# EAGLE board folimetro_pcb (EAGLE 6.2)
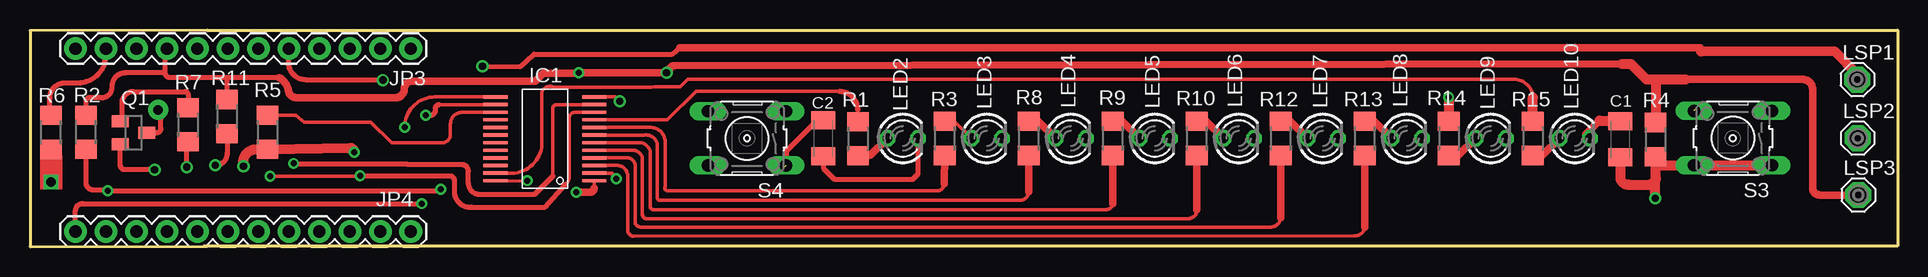
[diagram p0: board, top side]
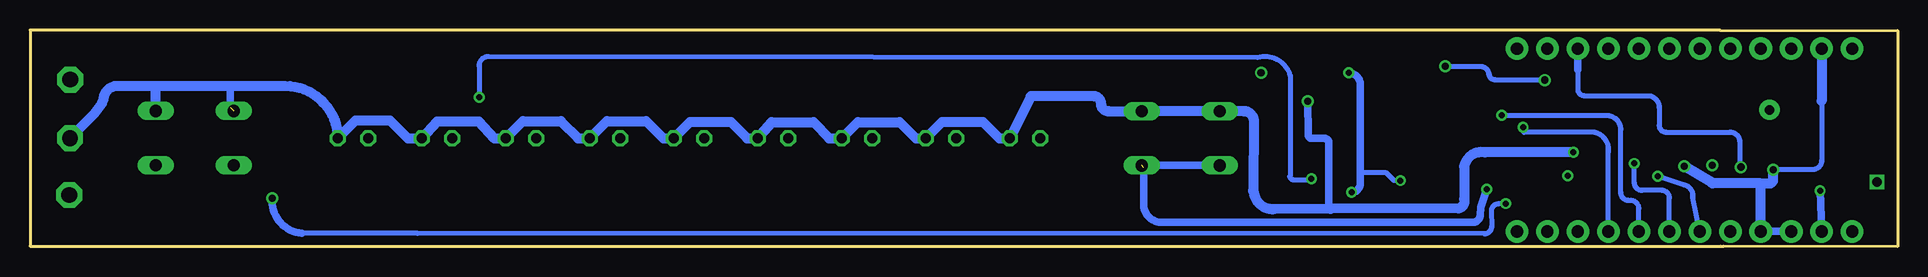
[diagram p1: board, bottom side, seen from below]

Size 155.64 x 18.06 mm. Coordinates in mm from the lower left corner, seen from the top.
Outline: 14.5,0.04 155.64,0.06 155.64,18.06 14.79,18.03
Outline: 14.77,0.03 0,0 0,18 14.77,18.03
Copper layers (1*16): Top 0.035mm / dielectric 1.5mm / Bottom 0.035mm
Design rules: minimum track width 10mil, minimum drill 24mil, track to track 8mil, track to pad 8mil, pad to pad 8mil, via to via 8mil, smd to smd 8mil, copper to edge 40mil, drill to drill 8mil, minimum pad ring 10mil, minimum via ring 8mil, stop-mask expansion 4mil, vias tented up to drill 0mil, thermal gap 10mil

## Footprints (pad centres in the part's own frame; a part is rotated, then mirrored left to right if it is on the bottom)
C1206K = smd 1.5 x 2: 1 -1.5,0; 2 1.5,0
SO24W = smd 0.279 x 2.032: 1 -6.985,-4.115; 2 -6.35,-4.115; 3 -5.715,-4.115; 4 -5.08,-4.115; 5 -4.445,-4.115; 6 -3.81,-4.115; 7 -3.175,-4.115; 8 -2.54,-4.115; 9 -1.905,-4.115; 10 -1.27,-4.115; 11 -0.635,-4.115; 12 0,-4.115; 13 0,4.115; 14 -0.635,4.115; 15 -1.27,4.115; 16 -1.905,4.115; 17 -2.54,4.115; 18 -3.175,4.115; 19 -3.81,4.115; 20 -4.445,4.115; 21 -5.08,4.115; 22 -5.715,4.115; 23 -6.35,4.115; 24 -6.985,4.115
1X12 = drill 1.016 pad 1.88: 1 0,0; 2 2.54,0; 3 5.08,0; 4 7.62,0; 5 10.16,0; 6 12.7,0; 7 15.24,0; 8 17.78,0; 9 20.32,0; 10 22.86,0; 11 25.4,0; 12 27.94,0
LED3MM = drill 0.813 octagon: A -1.27,0; K 1.27,0
SE13 = drill 1.321 pad 2.159 octagon: MP 0,0
SOT23 = smd 1 x 1.4: 1 -0.95,-1.1; 2 0.95,-1.1; 3 0,1.1
R1206 = smd 1.6 x 1.803: 1 -1.422,0; 2 1.422,0
B3F-10XX = drill 1.016 long: 1 -3.251,2.261; 2 3.251,2.261; 3 -3.251,-2.261; 4 3.251,-2.261

## Placement (x,y rotation side)
C1  [C1206K]  132.53,8.94 90 top
C2  [C1206K]  66.11,9.03 270 top
IC1  [SO24W]  42.91,12.48 90 top
JP3  [1X12]  3.79,16.51 0 top
JP4  [1X12]  31.73,1.27 180 top
LED2  [LED3MM]  72.73,9.03 0 top
LED3  [LED3MM]  79.73,9.03 0 top
LED4  [LED3MM]  86.73,9.03 0 top
LED5  [LED3MM]  93.73,9.03 0 top
LED6  [LED3MM]  100.73,9.03 0 top
LED7  [LED3MM]  107.73,9.03 0 top
LED8  [LED3MM]  114.73,9.03 0 top
LED9  [LED3MM]  121.73,9.03 0 top
LED10  [LED3MM]  128.73,9.03 0 top
LSP1  SE13  [SE13]  152.28,13.93 0 top
LSP2  SE13  [SE13]  152.31,9.05 0 top
LSP3  SE13  [SE13]  152.36,4.31 0 top
Q1  BC547  [SOT23]  8.63,9.5 270 top
R1  [R1206]  68.99,9 90 top
R2  [R1206]  4.66,9.54 270 top
R3  [R1206]  76.23,9.03 270 top
R4  [R1206]  135.47,8.93 90 top
R5  [R1206]  19.79,9.54 90 top
R6  [R1206]  1.76,9.53 270 top
R7  [R1206]  13.16,10.17 90 top
R8  [R1206]  83.23,9.03 270 top
R9  [R1206]  90.23,9.03 270 top
R10  [R1206]  97.23,9.03 270 top
R11  [R1206]  16.43,10.84 90 top
R12  [R1206]  104.23,9.03 270 top
R13  [R1206]  111.23,9.03 270 top
R14  [R1206]  118.23,9.03 90 top
R15  [R1206]  125.23,9.03 90 top
S3  [B3F-10XX]  141.91,9.05 180 top
S4  [B3F-10XX]  59.75,9.03 180 top

## Library data of the parts
C1 C2 R1-R4 R6 R8-R10 R12-R15 = rcl
IC1 = 40xx
JP3 JP4 = SparkFun
LED2-LED10 = led
LSP1-LSP3 = solpad
Q1 = transistor-npn
R5 R7 R11 = resistor
S3 S4 = switch-omron; MPN: B3F-1000; OC_FARNELL: 176432; OC_NEWARK: 36M3542

## Nets
+5V: IC1.1 IC1.24 JP3.4 LSP3.MP R2.1 R4.2 R11.2
GND [vcc]: C1.2 C2.2 IC1.12 JP3.2 JP4.9 JP4.10 LED2.K LED3.K LED4.K LED5.K LED6.K LED7.K LED8.K LED9.K LED10.K LSP2.MP Q1.2 R5.1 R6.1 S3.3 S3.4 S4.3 S4.4
N$1: C1.1 JP4.12 R4.1 S3.1 S3.2
N$2: Q1.1 R7.2
N$3: IC1.15 R5.2
N$4: IC1.10 JP4.7
N$5: IC1.11 JP4.6
N$6: IC1.14 JP4.5
N$7: IC1.13 JP4.4
N$9: IC1.9 R1.2
N$10: LED2.A R1.1
N$11: IC1.8 R3.2
N$12: LED3.A R3.1
N$13: IC1.2 R14.2
N$14: IC1.7 R8.2
N$15: LED4.A R8.1
N$16: IC1.6 R9.2
N$17: LED5.A R9.1
N$18: IC1.5 R10.2
N$19: LED6.A R10.1
N$20: IC1.4 R12.2
N$21: LED7.A R12.1
N$22: IC1.3 R13.2
N$23: LED8.A R13.1
N$24: IC1.23 R15.2
N$25: LED9.A R14.1
N$26: C2.1 JP4.11 R2.2 S4.1 S4.2
N$27: LED10.A R15.1
N$30 [vcc]: Q1.3
N$34: JP3.10 R7.1
N$35: R11.1
N$36: JP3.8 LSP1.MP

## Tracks (layer width: path | path; a pad name or v marks a point on that pad's centre or on a via)
+5V  (via drill 0.5, 0.6)
  Top 0.254: IC1.24 v41.43,5.52
  Top 0.305: 47,4.88 47,5.47 arc-90 IC1.1 | 45.71,14.46 v45.74,14.49 | 152.29,4.24 arc90 LSP3.MP
  Top 0.406: 4.41,10.38 arc90 R2.1 | 20.77,14.1 16.23,14.1 | 16.23,14.1 11.65,14.1 arc-90 11.26,14.49 | 11.26,14.49 11.26,16.36 arc-90 JP3.4 | 11.26,14.49 7.95,14.49 arc90 6.82,13.36 6.82,13.26 arc-90 5.96,12.4 4.92,12.4 arc90 4.66,12.14 R2.1 | R11.2 16.43,13.9 arc90 16.23,14.1 | 4.44,10.51 arc90 R2.1
  Top 0.61: 132.65,15.24 53.71,15.08 53.64,15.08 arc90 53.31,14.75 v53.05,14.49 v45.74,14.49 | v45.51,4.53 46.65,4.53 arc90 47,4.88 | 45.71,14.46 42.76,14.46 42.11,13.81 31.79,13.81 arc84 31.18,13.13 arc-90 30.46,12.41 23.02,12.43 22.32,12.43 arc-90 21.53,13 arc51 20.77,14.1 | LSP3.MP 149.15,4.31 arc-90 148.55,4.91 148.55,13.11 arc90 147.72,13.94 137.97,13.94 arc-90 137.96,13.95
  Top 0.813: 132.65,15.24 133.41,15.24 134.7,13.95 135.54,13.95 | 135.54,13.95 137.96,13.95 | R4.2 135.54,10.35 135.54,13.95
  Bottom 0.254: v41.43,5.52 41.23,5.5 | 44.77,6.15 44.79,6.13
  Bottom 0.406: 41.23,5.5 41.96,5.5 42.61,6.15 44.77,6.15
  Bottom 0.61: v45.74,14.49 arc90 44.79,13.54 44.79,6.13 44.79,5.25 arc90 v45.51,4.53
GND  (via drill 0.5, 0.6)  (1 unrouted)
  Top 0.305: IC1.12 48.79,12.48 v49.15,12.12
  Top 0.406: C2.2 66.11,6.56 67.03,5.64 73.58,5.64 74.02,6.08 74.02,9.01 LED2.K | R6.1 1.65,10.35 1.65,12.37 arc-90 2.94,13.66 4.01,13.66 arc90 6.33,15.98 JP3.2 | v10.38,6.42 7.9,6.42 arc-90 7.52,6.8 Q1.2 arc-90 Q1.2
  Top 0.61: v17.79,6.7 17.77,7.13 | 20.04,8.11 arc90 R5.1 | 130.79,10.51 129.65,9.38 LED10.K
  Top 0.813: 17.77,7.13 arc-90 18.92,8.11 20.04,8.11 | R5.1 26.65,8.24 arc-90 v27.02,7.87 | 130.79,10.51 132.46,10.51 arc-90 C1.2
  Bottom 0.305: 47.41,3.28 arc-90 47.28,3.15
  Bottom 0.406: 10.44,6.48 arc90 v10.38,6.42 arc90 v10.37,6.43 7.08,6.43 arc-90 6.33,7.18 6.33,12.14 | S4.4 56.15,11.29
  Bottom 0.61: JP4.10 JP4.9 11.49,1.27 | 15.45,5.27 arc90 15.54,5.36 | 53.7,4.65 arc90 53.62,4.5 | LED10.K 130,9.22 | v49.15,12.12 49.13,9.37 arc-90 48.78,9.02 47.75,9.02 arc90 47.41,8.68 47.41,3.28 | 145.16,13.12 145.44,13.4 | 138.95,11.6 138.95,13.4 | 10.45,6.48 10.44,6.48
  Bottom 0.813: JP4.9 11.41,5.27 | 11.41,5.27 15.45,5.27 | 15.54,5.36 v17.79,6.7 | v27.02,7.87 34.41,7.87 arc-90 36.12,6.69 36.12,3.97 arc90 36.58,3.19 47.28,3.15 51.94,3.13 arc90 53.62,4.5 | JP3.2 6.33,12.14 | LSP2.MP 150.32,11.04 149.66,11.93 149.5,12.28 arc90 148.38,13.4 145.44,13.4 138.95,13.4 134.37,13.4 arc90 LED10.K 128.5,10.53 125.66,10.53 124.16,9.03 LED9.K 121.71,10.45 118.23,10.45 116.94,9.03 LED8.K 114.56,10.47 111.4,10.47 109.96,9.03 LED7.K 107.56,10.47 104.3,10.47 102.86,9.03 LED6.K 100.63,10.4 97.24,10.4 95.87,9.03 LED5.K 93.84,10.38 90.33,10.38 89.05,9.03 LED4.K 86.65,10.38 83.17,10.38 81.82,9.03 LED3.K 79.62,10.41 76.24,10.41 74.86,9.03 LED2.K arc-90 73.96,9.07 72.27,12.44 arc90 72.15,12.56 67.02,12.56 arc90 66.39,11.93 66.39,11.9 arc-90 65.78,11.29 S4.3 arc-90 S4.3 S4.4 56.46,11.3 54.57,11.3 arc90 53.66,10.57 53.72,4.67 arc-90 53.7,4.65 | 11.41,5.27 10.7,5.27 arc-90 10.39,5.58 v10.39,6.41 arc90 v10.38,6.42 | S3.3 145.16,13.12
N$1  (via drill 0.5, 0.6)
  Top 0.406: JP4.12 3.79,3 arc-90 4.4,3.6 v32.65,3.6
  Top 0.813: C1.1 132.53,5.8 arc90 133.15,5.18 134.98,5.18 arc90 135.48,5.68 | 135.48,5.68 135.48,7.5 arc90 R4.1 135.47,6.83 arc-90 135.44,6.8 138.65,6.8 arc-90 S3.2 S3.1 | v135.45,4.05 135.45,5.65 arc-90 135.48,5.68
  Bottom 0.406: 133,1.12 123.34,1.12 34.45,1.07 arc-90 33.83,1.69 33.86,2.97 arc90 33.26,3.57 32.66,3.58 v32.66,3.59 arc90 v32.65,3.6
  Bottom 0.61: 133,1.12 arc90 v135.45,4.05
N$2
  Top 0.406: Q1.1 arc90 7.65,10.57 7.65,11.97 arc-90 8.61,12.93 12.92,12.93 arc-90 13.18,12.67 13.18,11.61 arc-90 R7.2
N$3
  Top 0.305: R5.2 22.15,10.95 22.84,10.39 28.39,10.39 30.13,8.65 34.3,8.65 arc90 35.04,9.39 35.04,10.24 arc-90 35.99,11.2 38.77,11.2 arc90 IC1.15
N$4  (via drill 0.5)
  Top 0.305: 44.66,5.21 arc57 44.92,5.99 44.92,10.69 arc-90 45.43,11.2 IC1.10 arc90 IC1.10 | v20,5.88 27.47,5.88 v27.5,5.91 27.96,5.91
  Top 0.406: 27.96,5.91 34.97,5.91 arc-90 35.36,5.52 35.36,4.54 arc90 36.78,3.29 42.93,3.29 44.66,5.21
  Bottom 0.406: JP4.7 17.07,4.12 arc-90 17.88,5.17 v20,5.88
N$5  (via drill 0.5)
  Top 0.305: IC1.11 43.91,11.84 arc90 43.57,11.51 43.57,5.88 | 22.04,6.86 arc-90 v21.96,6.94
  Top 0.406: 22.04,6.86 31.46,6.86 arc90 31.48,6.84 35.98,6.84 arc-90 36.53,6.29 36.53,5.31 arc90 37.49,4.35 42.04,4.35 43.57,5.88
  Bottom 0.406: JP4.6 19.03,4.07 arc-90 19.66,4.7 21.32,4.7 arc90 21.94,5.32 v21.96,6.94
N$6  (via drill 0.5)
  Top 0.305: 34.1,11.84 IC1.14 arc90 IC1.14 | 33.78,11.39 33.78,11.52
  Top 0.406: v32.98,10.95 33.34,10.95 arc90 33.78,11.39 | 33.78,11.52 arc-90 34.1,11.84
  Bottom 0.305: 22.26,3.86 22.43,3.86 | 32.95,10.92 arc90 v32.98,10.95
  Bottom 0.406: JP4.5 21.57,3.17 arc-90 22.26,3.86 | 22.43,3.86 arc90 23.07,4.5 23.07,9.76 arc-90 24.23,10.92 32.95,10.92
N$7  (via drill 0.5)
  Top 0.305: IC1.13 33.74,12.48 arc90 v31.22,9.96
  Bottom 0.305: 31.14,9.53 arc90 v31.22,9.96
  Bottom 0.406: JP4.4 24.11,7.9 arc-90 25.38,9.55 31.14,9.53
N$8  (via drill 0.8)
  other vias: 1.74,5.39
N$9
  Top 0.305: IC1.9 53.12,10.58 55.5,12.96 67.44,12.94 | 68.99,11.39 R1.2
  Top 0.406: 68.99,11.39 arc90 67.44,12.94
N$10
  Top 0.61: R1.1 70.04,7.61 LED2.A
N$11
  Top 0.305: 76.2,5.26 arc-90 75.51,4.65 53.16,4.65 arc-102 52.92,5 52.92,8.87 arc90 51.56,9.94 IC1.8
  Top 0.61: R3.2 76.2,5.26
N$12
  Top 0.305: R3.1 77.04,10.45 LED3.A
N$13  (via drill 0.5)
  Top 0.305: IC1.2 48.54,6.13 v48.85,5.65 | 118.21,10.47 arc90 R14.2
  Top 0.813: v118.21,12.46 118.21,10.47
  Bottom 0.305: 48.96,5.58 arc-90 v48.85,5.65
  Bottom 0.406: 48.96,5.58 50.28,5.58 arc90 50.67,5.87 50.61,5.93 50.61,14.25 arc-90 53.34,15.76 117.43,15.85 arc-90 118.22,15.06 v118.22,12.47 arc-90 v118.21,12.46
N$14
  Top 0.305: 83.23,4.58 arc-90 82.44,3.86 52.53,3.86 arc-100 52.27,4.18 52.27,8.53 arc90 51.17,9.3 IC1.7 arc-90 IC1.7
  Top 0.61: R8.2 83.23,4.58
N$15
  Top 0.305: R8.1 84.04,10.45
  Top 0.61: 84.04,10.45 LED4.A
N$16
  Top 0.305: 90.23,3.59 arc-90 89.66,3.1 51.88,3.1 arc-90 51.7,3.48 51.7,7.89 arc90 50.55,8.66 47.03,8.66 arc-90 IC1.6
  Top 0.61: R9.2 90.23,3.59
N$17
  Top 0.305: R9.1 91.04,10.45
  Top 0.61: 91.04,10.45 LED5.A
N$18
  Top 0.305: 97.22,3.09 arc-90 96.63,2.37 96.65,2.35 51.41,2.35 arc-90 51.04,2.64 51.04,7.35 arc90 50.07,8.04 IC1.5 arc90 IC1.5
  Top 0.61: R10.2 97.22,3.09
N$19
  Top 0.305: R10.1 98.04,10.45
  Top 0.61: 98.04,10.45 LED6.A
N$20
  Top 0.305: 104.23,2.41 arc-90 103.3,1.64 50.92,1.64 arc-90 50.43,2.05 50.43,6.86 arc90 49.54,7.4 IC1.4
  Top 0.61: R12.2 104.23,2.41
N$21
  Top 0.305: R12.1 105.04,10.45
  Top 0.61: 105.04,10.45 LED7.A
N$22
  Top 0.305: 111.23,1.62 arc-90 110.35,0.92 50.3,0.88 arc-90 49.81,1.41 49.81,5.97 arc90 48.81,6.77 IC1.3 arc90 IC1.3
  Top 0.61: R13.2 111.23,1.62
N$23
  Top 0.305: R13.1 112.04,10.45
  Top 0.61: 112.04,10.45 LED8.A
N$24
  Top 0.305: IC1.23 arc90 IC1.23 39.93,6.13 40.4,6.14 arc73 42.64,8.29 42.64,12.88 arc-90 43.63,13.31 51.78,13.31 52,13.32 54.17,13.32 54.8,13.95 123.7,13.95 arc-90 125.23,12.42
  Top 0.813: R15.2 125.23,12.42
N$25
  Top 0.305: R14.1 119.04,7.61
  Top 0.61: 119.04,7.61 LED9.A
N$26  (via drill 0.5)  (1 unrouted)
  Top 0.305: 6.36,4.64 6.46,4.46 6.65,4.73 arc90 v6.47,4.67 arc90 6.45,4.69 | 33.87,4.67 arc90 v34.24,4.78
  Top 0.406: 33.87,4.67 v6.47,4.67 arc90 6.4,4.74 5.26,4.74 arc-90 4.66,5.34 R2.2 | C2.1 65.59,10.53 63,7.94 S4.1
  Bottom 0.305: 63.13,6.77 S4.1
  Bottom 0.61: S4.1 S4.2 | v34.24,4.78 34.73,3.29 34.73,3.23 arc90 34.74,3.22 | 34.73,3.3 34.74,3.22 | 34.74,3.22 34.79,2.71 arc90 35.35,2.03 61.17,2.03 arc90 62.83,3.42 62.83,6.6 | JP4.11 6.34,1.3 v6.47,4.67
N$27
  Top 0.406: R15.1 126.04,7.61
  Top 0.61: 126.04,7.61 LED10.A
N$30  (via drill 0.8 pad 1.68)
  Top 0.406: Q1.3 10.55,9.5 arc90 10.91,9.86 10.91,10.81 arc90 v10.68,11.4
  Bottom 0.406: v10.68,11.4 10.87,10.98 arc90 10.82,10.96
N$34  (via drill 0.6)
  Top 0.406: v13.06,6.64 13.06,8.65 arc-90 R7.1
  Bottom 0.305: 26.66,14.73 arc90 26.65,14.74
  Bottom 0.406: 26.66,14.73 26.66,13.15 arc-90 26.09,12.58 20.84,12.58 arc90 19.87,11.61 19.87,10.11 arc-90 19.31,9.55 13.96,9.55 arc90 R7.1 13.16,6.74 arc-90 v13.06,6.64
  Bottom 0.61: 26.65,14.74 JP3.10
N$35  (via drill 0.6)
  Top 0.406: R11.1 16.43,7.76 arc-90 v15.45,6.78
N$36  (via drill 0.6)
  Top 0.305: LSP1.MP 152.28,14.39
  Top 0.406: v37.71,15.05 40.85,15 41.99,16.06 53.54,16.06 54.13,16.57 | v29.41,13.89 arc90 29.38,13.92 22.95,13.92 arc-90 21.56,15.31 JP3.8 arc-90 JP3.8
  Top 0.61: 54.13,16.57 139.17,16.57 139.26,16.26
  Top 0.813: 152.28,14.39 150.39,16.28 139.26,16.26
  Bottom 0.305: 34.04,14.27 34.08,14.45 | 29.44,13.92 arc90 v29.41,13.89
  Bottom 0.406: v37.71,15.05 34.8,15.03 arc90 34.04,14.27 | 34.08,14.45 arc-90 33.55,13.92 29.44,13.92
(copper drawn outside any net)
  shapes: Top area x1